# Altium PCB RGB_Ring_v2_PCB.PcbDoc
Units mm, origin at the board's own origin, x right, y up, seen from the top; angles counter-clockwise.
Board outline 22.5 x 38.5 mm, 2 copper layers (Top Layer, Bottom Layer), stack 1.571 mm thick; 19 components, 12 nets, 60 pads, 22 vias.
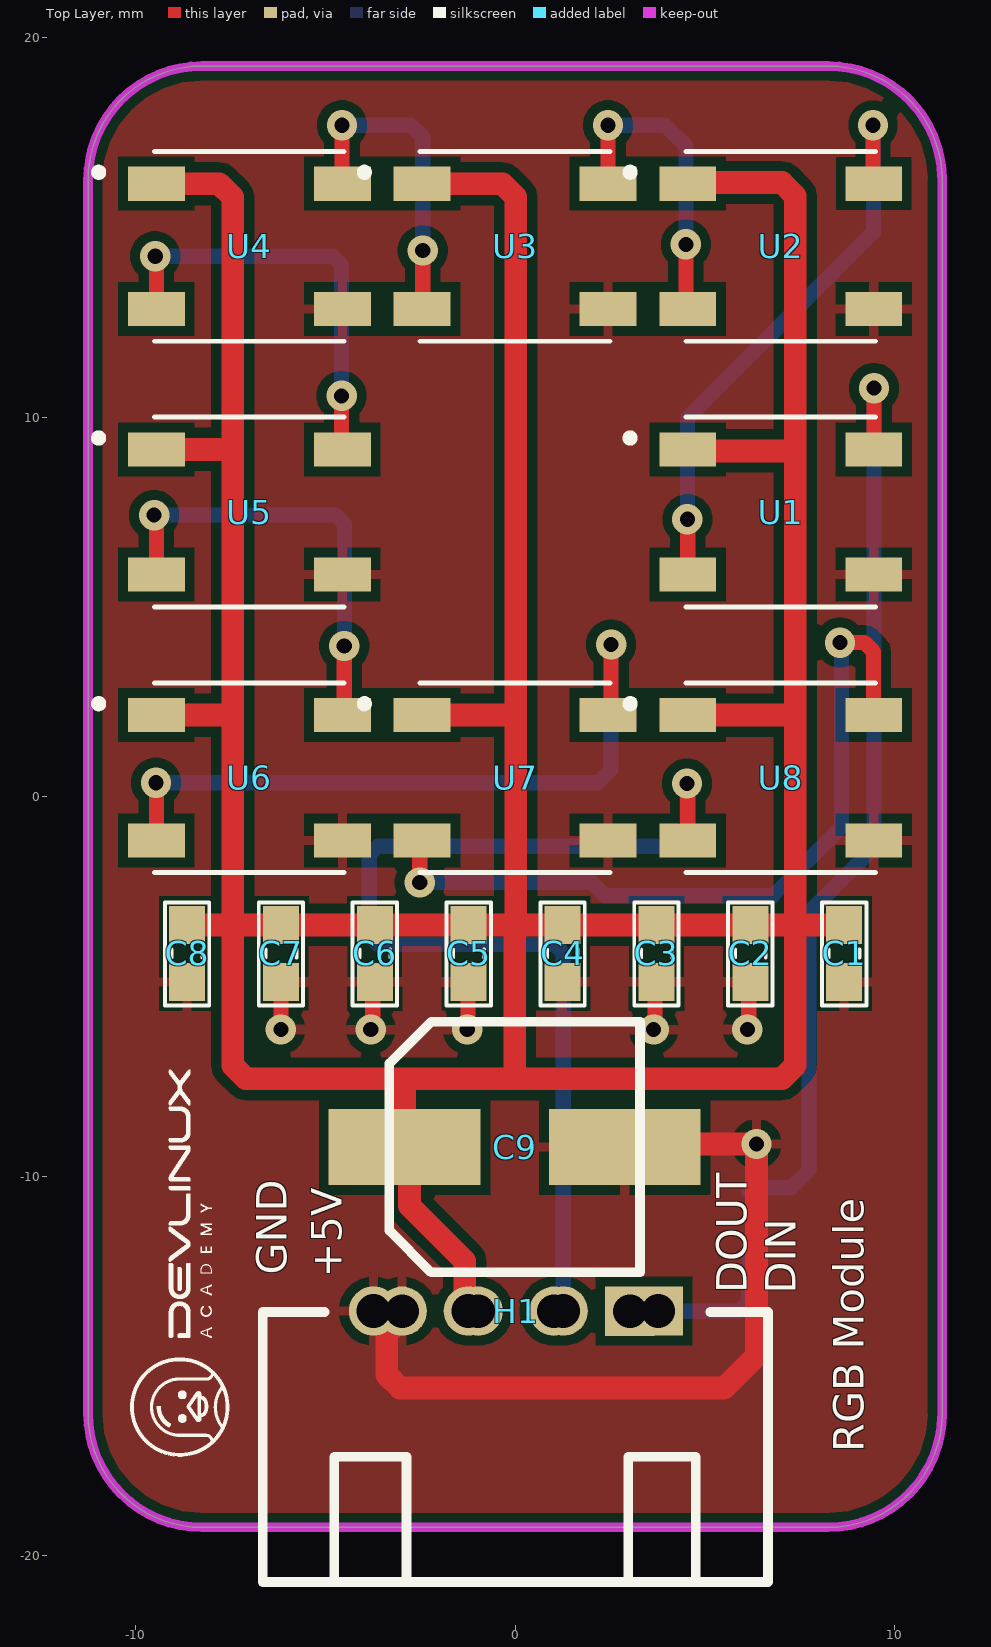
[diagram p0: Top Layer view]
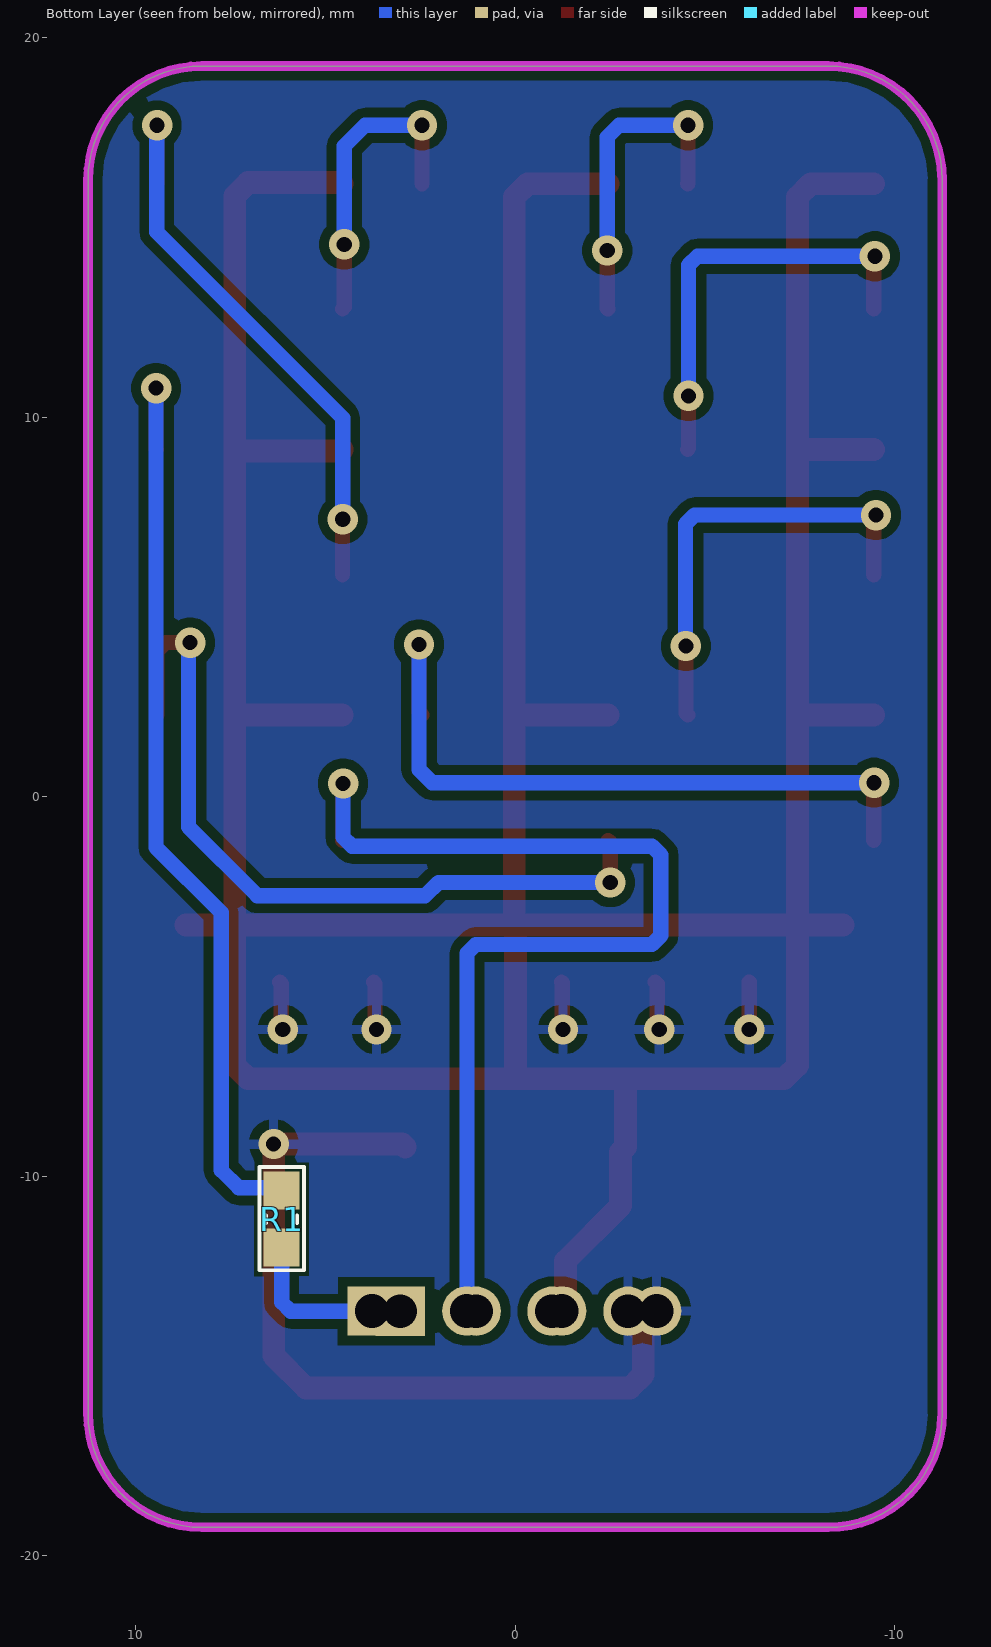
[diagram p1: Bottom Layer view, seen from below]
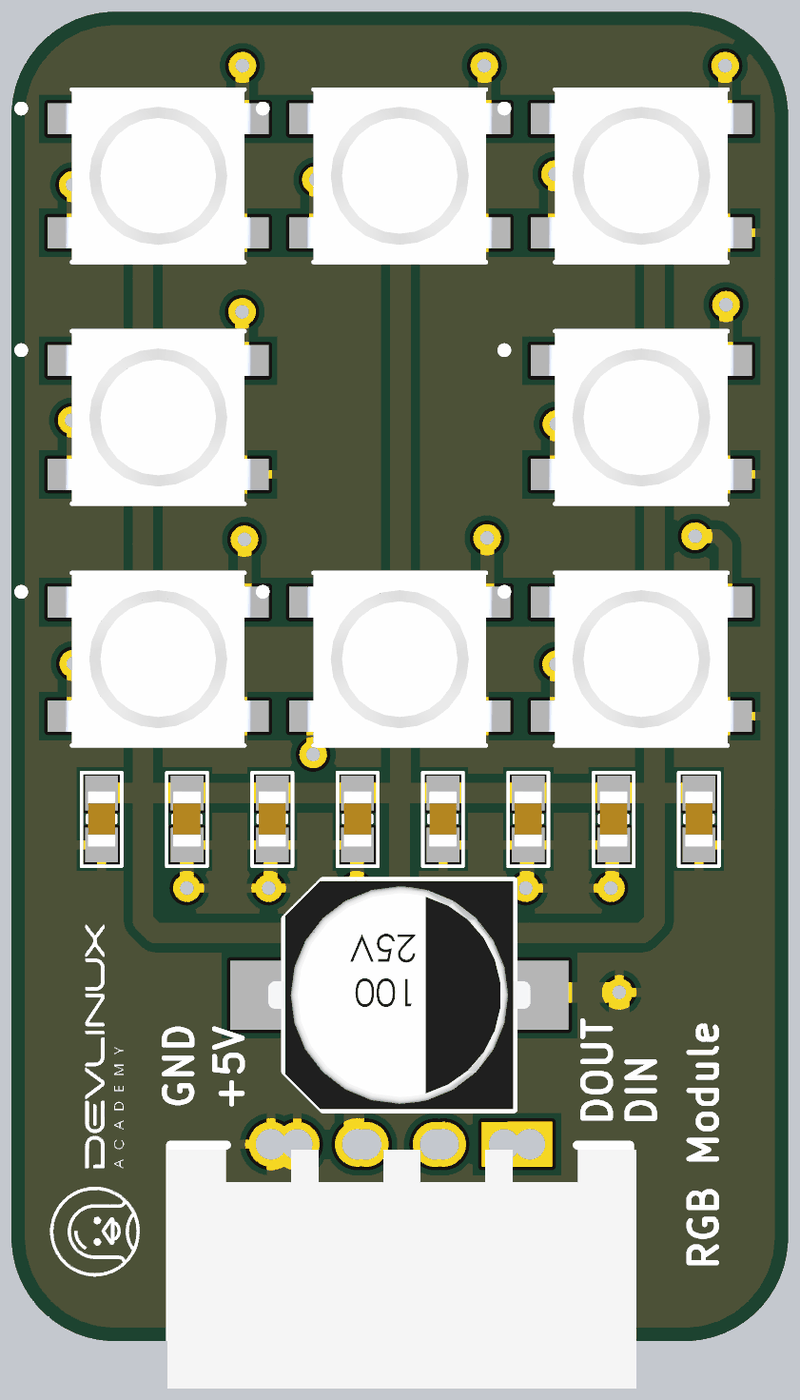
[diagram p2: 3D render of the assembled board from above, using the file's embedded part models]

## Layer stack, top to bottom
Top Solder: solder mask 0.0102, Solder Resist, Dk 3.5
Top Layer: signal copper 0.0356
Dielectric 1: dielectric 1.5, FR-4, Dk 4.8
Bottom Layer: signal copper 0.0356
Bottom Solder: solder mask 0.0102, Solder Resist, Dk 3.5

## Board outline
-11.25,-16.25 -11.25,16.25 cw(c-8.25,16.25) -8.25,19.25 8.25,19.25 cw(c8.25,16.25) 11.25,16.25 11.25,-16.25 cw(c8.25,-16.25) 8.25,-19.25 -8.25,-19.25 cw(c-8.25,-16.25)

## Design rules (kind name [scope] priority, off if disabled: settings)
Clearance [All] p1: gap=0.254 ignorepadtopadclearanceinfootprint=FALSE
PolygonConnect [All] p1: connectstyle=Relief reliefconductorwidth=0.254 reliefentries=4 polygonreliefangle="90 Angle" airgapwidth=0.254
RoomDefinition RGB_Ring_v2_SCH [InComponentClass('RGB_Ring_v2_SCH')] p1: confinementstyle=ConfineIn formatcopy=TRUE lockcomponents=FALSE outline 285.876,120.809 320.928,120.809 320.928,140.113 285.876,140.113
RoutingVias [All] p1: holewidth=0.4 width=0.8 viastyle="Through Hole" minholewidth=0.3 minwidth=0.6 maxholewidth=0.5 maxwidth=1
SolderMaskExpansion [All] p1: expansion=0.102 istentingtop=FALSE
Width [All] p1: maxlimit=0.6 minlimit=0.254 preferedwidth=0.4
30 further rules are at their usual default settings.

## Components (designator, comment, footprint, x,y, rotation, side; value= is the part's Value field where it differs from the comment)
C1 "100nF" "tu 0603" 8.67,-4.13 r270 top
C2 "100nF" "tu 0603" 6.197,-4.13 r270 top
C3 "100nF" "tu 0603" 3.724,-4.13 r270 top
C4 "100nF" "tu 0603" 1.251,-4.13 r270 top
C5 "100nF" "tu 0603" -1.221,-4.13 r270 top
C6 "100nF" "tu 0603" -3.694,-4.13 r270 top
C7 "100nF" "tu 0603" -6.167,-4.13 r270 top
C8 "100nF" "tu 0603" -8.64,-4.13 r270 top
C9 "100uF" "tu nhom 6.3 (d)" -0.01,-9.23 r0 top
H1 "Header 4P 2.54 + 2.0 Duc Cong" "Header 4P DC 2.54 + 2.0" 3.745,-13.575 r270 top
R1 "470" "tro smd 0603" 6.147,-11.13 r90 bottom
U1 "WS2812B-B" LED_WS2812B-B 7,7.5 r0 top
U2 "WS2812B-B" LED_WS2812B-B 7,14.5 r0 top
U3 "WS2812B-B" LED_WS2812B-B 0,14.5 r0 top
U4 "WS2812B-B" LED_WS2812B-B -7,14.5 r0 top
U5 "WS2812B-B" LED_WS2812B-B -7,7.5 r0 top
U6 "WS2812B-B" LED_WS2812B-B -7,0.5 r0 top
U7 "WS2812B-B" LED_WS2812B-B 0,0.5 r0 top
U8 "WS2812B-B" LED_WS2812B-B 7,0.5 r0 top

## Footprints (in the part's own frame and the unit in brackets; to place one, negate y for a bottom-side part, rotate by r counter-clockwise, add the part's x,y. Pads: shape width x height; smd on the part's side, far side on the other; paste and mask are expansions set on the pad)
"Header 4P DC 2.54 + 2.0" [mm]
  rect 1.3x1.3 hole 0.889: 1(-0.025,0.025) 1(-0.022,-0.719)
  round 1.3 hole 0.889: 2(-0.025,-2.475) 2(-0.022,-2.719) 3(-0.025,-4.975) 3(-0.022,-4.719) 4(-0.025,-7.475) 4(-0.022,-6.718)
  silkscreen extent 0,-10.39 7.11,2.92, body extent 0.13,-10.48 7.06,3.11, height 7.38
LED_WS2812B-B [mm]
  rect 1.5x0.9 smd: 1(-2.45,1.65) 2(-2.45,-1.65) 3(2.45,-1.65) 4(2.45,1.65)
  silkscreen extent -4.07,-2.5 2.5,2.5, body extent -2.7,-2.5 2.7,2.5, height 1.62
"tro smd 0603" [mm] "Chip Capacitor, 2-Leads, Body 1,60x0,80mm, IPC Medium Density"
  rect 1x0.95 smd mask+0.076: 1(-0.75,0) 2(0.75,0)
  silkscreen extent -1.35,-0.58 1.37,0.58, body extent -0.82,-0.42 0.82,0.43, height 0.44
"tu 0603" [mm] "Chip Capacitor, 2-Leads, Body 1,60x0,80mm, IPC Medium Density"
  rect 1x0.95 smd mask+0.076: 1(-0.75,0) 2(0.75,0)
  silkscreen extent -1.35,-0.58 1.37,0.58, body extent -0.8,-0.4 0.8,0.4, height 0.9
"tu nhom 6.3 (d)" [mm]
  rect 4x2 smd: 1(-2.9,0) 2(2.9,0)
  silkscreen extent -3.3,-3.3 3.3,3.3, body extent -3.8,-3.3 3.8,3.3, height 8

## Part data
C1 C2 C3 C4 C5 C6 C7 C8: library part "Tu 0603 104 50V 10%", "Dán", Chung_Loai=Dán, Don_Vi=Con, Ma_Hang=MH004568, So_Chan=2, Ten_Linh_Kien="Tụ 0603 104-100nF 10% 50V"
C9: library part "Tu Nhom 100uF 16V", "Dán", Chung_Loai=Dán, Don_Vi=Con, Ma_Hang=MH002219, So_Chan=2, Ten_Linh_Kien="Tụ Nhôm 100uF 16V 6.3x5.4MM"
H1: "Cắm", Chung_Loai=Cắm, Don_Vi=Con, Ma_Hang=MH001310, Ten_Linh_Kien="Header 4P XH2.54-4P Đực Cong"
R1: library part "Tro 0603 5% 470R", "Dán", Chung_Loai=Dán, Don_Vi=Con, Ma_Hang=MH006328, So_Chan=2, Ten_Linh_Kien="Trở 0603 5% 470R"
U1 U2 U3 U4 U5 U6 U7 U8: "Intelligent control LED integrated light source", Package=None, Availability=Unavailable, MP=WS2812B-B, Price=None

## Via types
v1: diameter 0.8, hole 0.4, Top Layer to Bottom Layer, 22 vias

## Nets (pads, with @x,y where several pads share a name; then routed paths per layer and width w, separated by ;. In a path a pad name is that pad's centre, name@x,y a point inside that pad or via, vN(x,y) a via of type N, cw(c..) or ccw(c..) an arc to the next point about the centre after c; other vN are vias at no path point)
+5: C1.1 C2.1 C3.1 C4.1 C5.1 C6.1 C7.1 C8.1 C9.1 H1.3 U1.1 U2.1 U3.1 U4.1 U5.1 U6.1 U7.1 U8.1 | length 128.2
  Top Layer w0.6: U6.1 -7.45,2.15 -7.44,2.14 ; U5.1 -7.45,9.15 -7.44,9.16 ; U4.1 -7.791,16.15 -7.44,15.799 -7.44,9.16 ; C8.1 -7.44,-3.38 ; U7.1 -0.1,2.15 -0.03,2.22 ; U3.1 -0.331,16.15 0.02,15.799 0.02,2.15 0.02,-3.38 ; H1.3@-1.23,-13.55 -1.326,-13.454 -1.326,-12.234 -2.781,-10.779 -2.781,-9.359 C9.1 -2.91,-7.43 ; -0.01,-3.38 -0.01,-7.43 ; U8.1 7.264,2.15 7.384,2.27 ; U1.1 4.59,9.11 7.384,9.11 ; U2.1 4.58,16.18 7.032,16.18 7.384,15.829 7.384,9.11 ; C1.1 7.384,-3.38 ; -7.44,-3.38 -7.44,-7.079 -7.089,-7.43 -2.91,-7.43 ; -7.44,-3.38 C7.1 C6.1 C5.1 0.02,-3.38 ; -7.44,-3.38 -7.44,2.14 ; -7.44,2.14 -7.44,9.16 ; -2.91,-7.43 -0.01,-7.43 ; -0.01,-7.43 7.032,-7.43 7.384,-7.079 7.384,-3.38 ; 0.02,-3.38 C4.1 C3.1 C2.1 7.384,-3.38 ; 7.384,-3.38 7.384,2.27 ; 7.384,2.27 7.384,9.11
D_IN: H1.1 R1.1 | length 4.7
  Bottom Layer w0.4: H1.1@3.026,-13.553 5.913,-13.553 6.147,-13.319 R1.1
D_OUT: H1.2 U8.2 | length 28.3
  Top Layer w0.4: v1(4.53,0.35) 4.55,0.33 U8.2
  Bottom Layer w0.4: H1.2@1.27,-13.55 1.27,-4.124 1.036,-3.89 -3.606,-3.89 -3.84,-3.656 -3.84,-1.538 -3.606,-1.303 4.296,-1.303 4.53,-1.069 v1(4.53,0.35)
GND: C1.2 C2.2 C3.2 C4.2 C5.2 C6.2 C7.2 C8.2 C9.2 H1.4 U1.3 U2.3 U3.3 U4.3 U5.3 U6.3 U7.3 U8.3 | length 27.5
  Top Layer w0.4: v1(-6.17,-6.131) -6.169,-6.13 C7.2 C7.2 ; v1(-3.8,-6.131) -3.747,-6.079 -3.747,-4.933 C6.2 ; v1(-1.261,-6.131) -1.241,-6.111 -1.241,-4.9 C5.2 ; v1(3.65,-6.131) 3.687,-6.094 3.687,-4.917 C3.2 ; v1(6.12,-6.131) 6.159,-6.093 6.159,-4.919 C2.2
  Top Layer w0.6: H1.4@-2.974,-13.553 -2.974,-13.743 -3.38,-14.149 -3.38,-15.229 -3.029,-15.58 5.51,-15.58 6.36,-14.73 v1(6.36,-9.15) 2.97,-9.15 C9.2
NetR1_2: R1.2 U1.4 | length 24.7
  Top Layer w0.4: U1.4 9.455,9.155 v1(9.455,10.765)
  Bottom Layer w0.4: R1.2 6.227,-10.3 7.28,-10.3 7.74,-9.84 7.74,-3.05 9.455,-1.335 v1(9.455,10.765)
NetU1_2: U1.2 U2.4 | length 15.3
  Top Layer w0.4: v1(4.54,7.31) 4.55,7.3 U1.2 ; v1@9.43,17.65 9.43,16.17 U2.4
  Bottom Layer w0.4: v1(4.54,7.31) 4.54,9.98 9.44,14.88 9.44,17.64 v1@9.43,17.65
  other v1: 9.43,17.69
NetU2_2: U2.2 U3.4 | length 8.1
  Top Layer w0.4: U3.4 v1(2.45,17.69) ; v1(4.5,14.55) 4.5,12.9 U2.2
  Bottom Layer w0.4: v1(2.45,17.69) 3.95,17.69 4.5,17.14 v1(4.5,14.55)
NetU3_2: U3.2 U4.4 | length 8.3
  Top Layer w0.4: v1(-4.56,17.69) -4.56,16.16 U4.4 ; U3.2 -2.43,12.87 v1(-2.43,14.39)
  Bottom Layer w0.4: v1(-4.56,17.69) -2.74,17.69 -2.43,17.38 v1(-2.43,14.39)
NetU4_2: U4.2 U5.4 | length 11.3
  Top Layer w0.4: v1(-9.48,14.24) -9.45,14.21 U4.2 ; v1(-4.57,10.56) -4.57,9.17 U5.4
  Bottom Layer w0.4: v1(-9.48,14.24) -9.44,14.28 -9.4,14.24 -4.804,14.24 -4.57,14.006 v1(-4.57,10.56)
NetU5_2: U5.2 U6.4 | length 11.8
  Top Layer w0.4: v1(-9.51,7.42) -9.45,7.36 U5.2 ; U6.4 -4.5,2.2 v1(-4.5,3.97)
  Bottom Layer w0.4: v1(-9.51,7.42) -4.724,7.42 -4.49,7.186 -4.49,3.98 v1(-4.5,3.97)
NetU6_2: U6.2 U7.4 | length 18.8
  Top Layer w0.4: v1(-9.46,0.37) -9.45,0.36 U6.2 ; U7.4 2.53,2.23 v1(2.53,4.01)
  Bottom Layer w0.4: v1(-9.46,0.37) 2.188,0.37 2.53,0.712 v1(2.53,4.01)
NetU7_2: U7.2 U8.4 | length 20.7
  Top Layer w0.4: v1(-2.51,-2.26) -2.51,-1.21 U7.2 ; v1(8.56,4.06) 9.206,4.06 9.44,3.826 9.44,2.16 U8.4
  Bottom Layer w0.4: v1(-2.51,-2.26) 2.019,-2.26 2.369,-2.61 6.79,-2.61 8.601,-0.799 8.601,4.019 v1(8.56,4.06)

## Polygon pours and split planes (outlines as drawn)
GND on Top Layer "NONET_L-01_P-001" (solid, remove dead copper, pour order 0): -11.25,19.25 11.25,19.25 11.25,-19.25 -11.25,-19.25
GND on Bottom Layer "NONET_L-01_P-001" (solid, remove dead copper, pour order 1): -11.25,-19.25 11.25,-19.25 11.25,19.25 -11.25,19.25

## Keep-outs
Keep-Out Layer:
  the board outline again, w0.254

## Silkscreen, mask and mechanical layers (free items; w line width, h text height)
Top Overlay:
  drawing of 21 lines, arcs and shapes, not listed
  text "GND" at -6.02,-12.6 h0.8 r90
  text "+5V" at -4.56,-12.67 h0.8 r90
  text "DOUT" at 6.11,-13.08 h0.8 r90
  text "DIN" at 7.39,-13.09 h0.8 r90
  text "RGB Module" at 9.19,-17.27 h0.8 r90